# Altium PCB PCB1.PcbDoc
Units mm, origin at the board's own origin, x right, y up, seen from the top; angles counter-clockwise.
Board outline 76.12 x 44.95 mm, 2 copper layers (Top Layer, Bottom Layer); 30 components, 46 nets, 177 pads, 52 vias.
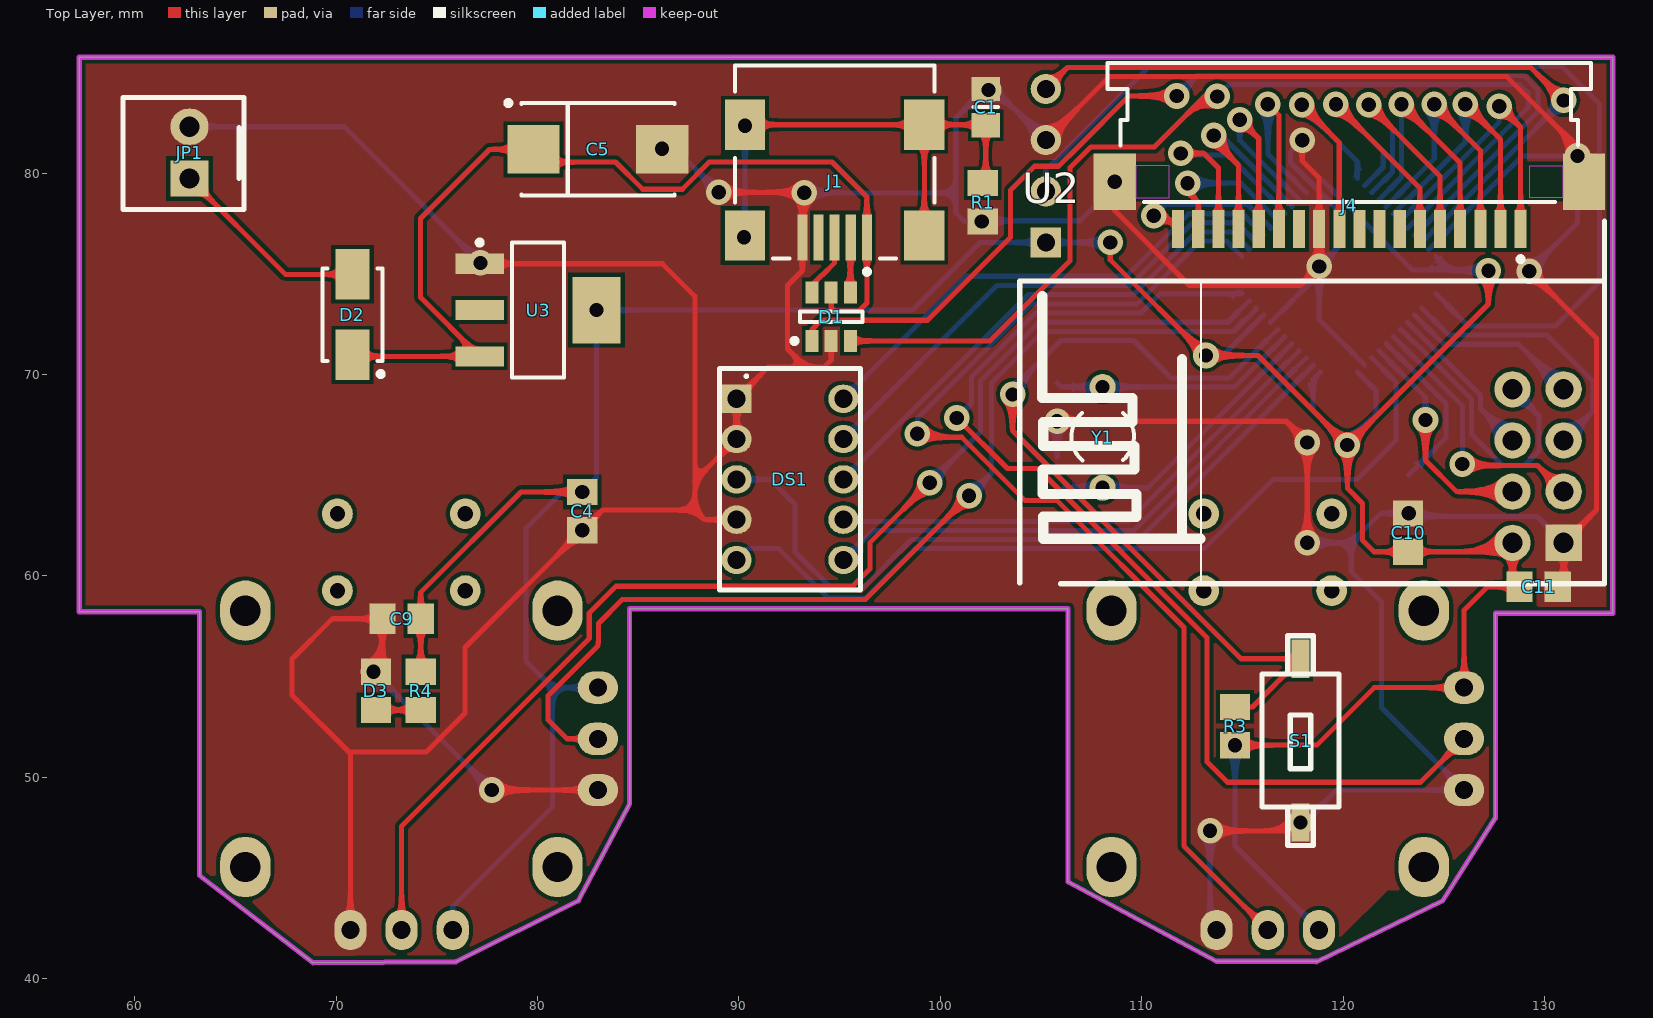
[diagram p0: Top Layer view]
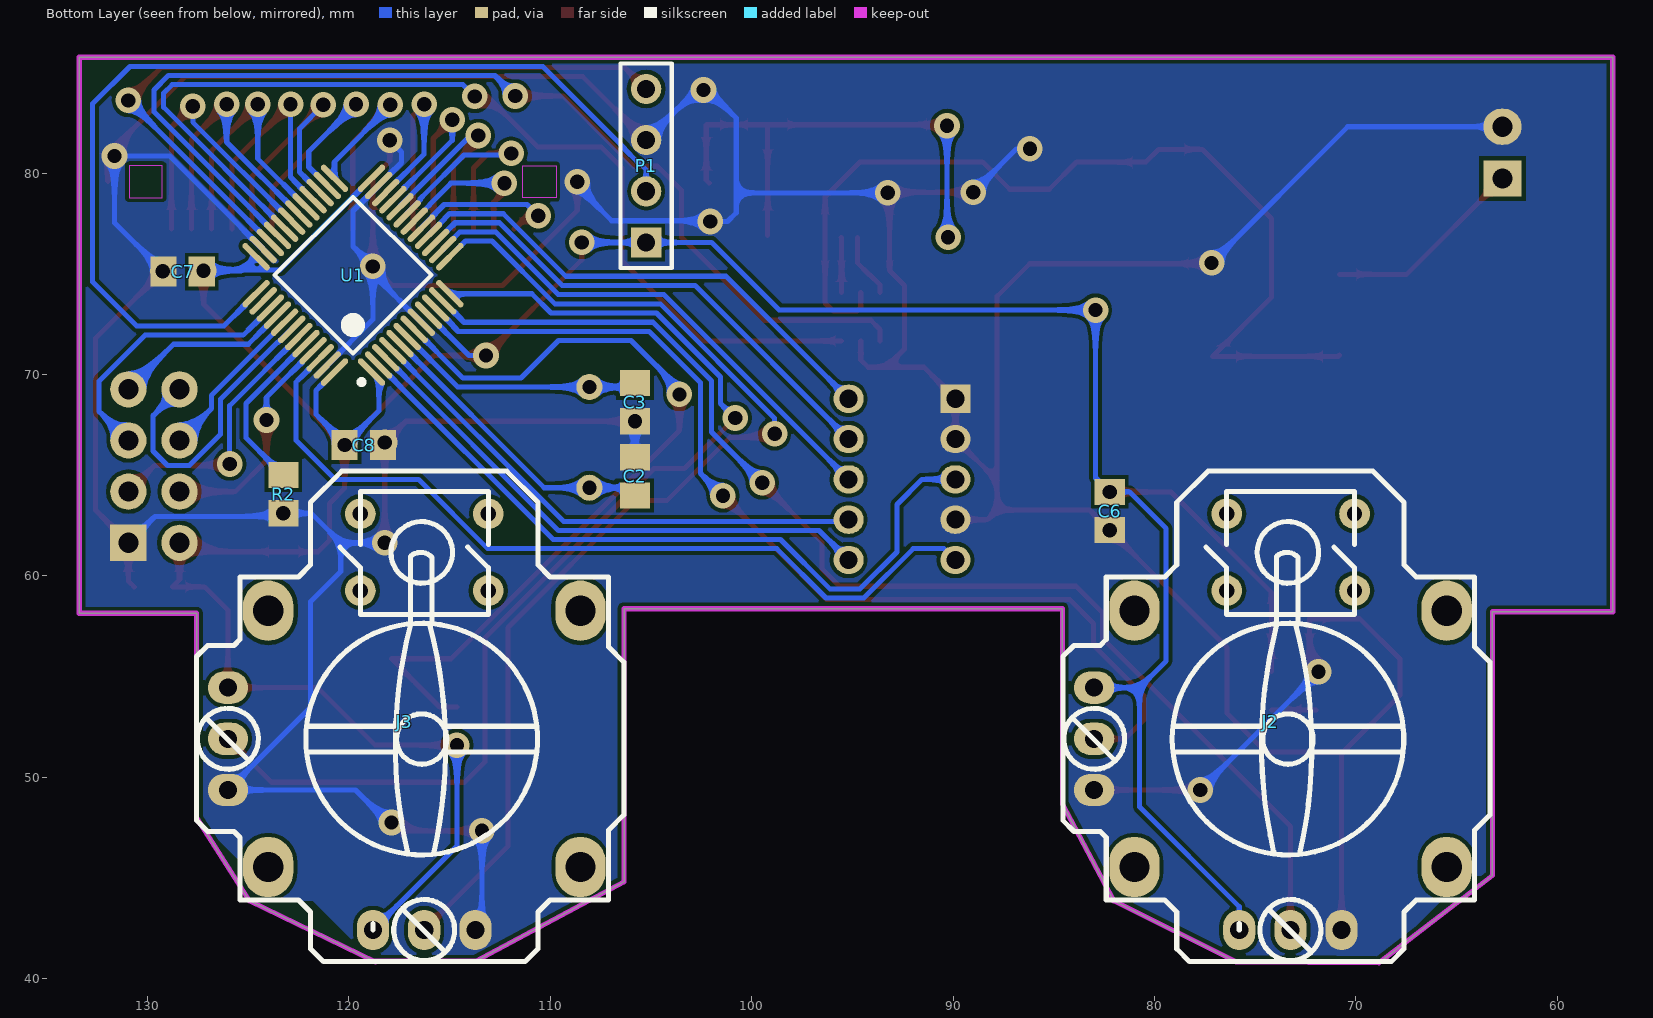
[diagram p1: Bottom Layer view, seen from below]

## Layer stack, top to bottom
Top Solder: solder mask 0.0102, Solder Resist, Dk 3.5
Top Layer: signal copper 0.0356
Dielectric 1: dielectric 0.32, FR-4, Dk 4.8
Bottom Layer: signal copper 0.0356
Bottom Solder: solder mask 0.0102, Solder Resist, Dk 3.5

## Board outline
63.225,45.129 68.85,40.8 75.95,40.85 82.025,43.875 84.575,48.7 84.575,58.375 106.325,58.375 106.325,44.812 113.7,40.875 118.675,40.875 118.675,40.85 124.925,43.875 127.55,47.975 127.55,58.15 133.375,58.15 133.375,85.75 57.25,85.75 57.25,58.225 63.225,58.225

## Design rules (kind name [scope] priority, off if disabled: settings)
AssemblyTestPointUsage [All] p1 off:
AssemblyTestpoint [All] p1 off: testpointundercomponent=TRUE minsize=1.016 maxsize=2.54 preferedsize=1.524 minholesize=0 maxholesize=1.016 preferedholesize=0.813 testpointgrid=0.025 usegrid=TRUE gridtolerance=0 allowsidetop=TRUE allowsidebottom=TRUE
Clearance [All] p1: gap=0.198
ComponentClearance [All] p1 off: gap=0.254 collisioncheckmode=3 verticalgap=0.254 showdistances=FALSE
FabricationTestPointUsage [All] p1 off: valid=0 allowmultiple=FALSE
FabricationTestpoint [All] p1 off: side=3 testpointundercomponent=TRUE minsize=1.016 maxsize=2.54 preferedsize=1.524 minholesize=0 maxholesize=1.016 preferedholesize=0.813 testpointgrid=0.025 allowsidetop=TRUE allowsidebottom=TRUE usegrid=TRUE gridtolerance=0
Height [All] p1 off: minheight=0 maxheight=25.4 prefheight=12.7
HoleSize [All] p1 off: absolutevalues=TRUE maxlimit=2.54 minlimit=0.025 maxpercent=80.000 minpercent=20.000
HoleToHoleClearance [All] p1 off: gap=0.254 allowstackedmicrovias=TRUE
LayerPairs [All] p1 off: enforce=TRUE
MinimumSolderMaskSliver [All] p1 off: minsoldermaskwidth=0.254
NetAntennae [All] p1 off: netantennaetolerance=0
PasteMaskExpansion [All] p1 off: expansion=0
PlaneConnect [All] p1: planeconnectstyle=Direct reliefexpansion=0.508 reliefentries=4 reliefconductorwidth=0.254 reliefairgap=0.254
PolygonConnect [All] p1: connectstyle=Direct reliefconductorwidth=0.254 reliefentries=4 polygonreliefangle="90 Angle" airgapwidth=0.254
RoutingPriority all [NOT InNet('GND')] p1: routingpriority=100
RoutingPriority GND [InNet('GND')] p2: routingpriority=1
RoutingVias [All] p1: holewidth=0.4 width=0.8 viastyle="Through Hole" minholewidth=0.4 minwidth=0.8 maxholewidth=0.4 maxwidth=0.8
SilkToSilkClearance [All] p1 off: silktosilkclearance=0.254
SilkToSolderMaskClearance [IsPad] p1 off: minsilkscreentomaskgap=0.254 clearancetoexposedcopper=TRUE
SolderMaskExpansion [All] p1 off: expansion=0.102
Width [All] p1: maxlimit=0.6 minlimit=0.254 preferedwidth=0.254
14 further rules are at their usual default settings.

## Components (designator, comment, footprint, x,y, rotation, side; value= is the part's Value field where it differs from the comment)
C1 "100n" 6-0805_N 102.25,83.275 r270 top
C2 "Cap_UP" 2012[0805] 105.791,64.948 r270 bottom
C3 "Cap_UP" 2012[0805] 105.791,68.631 r90 bottom
C4 "Cap_UP" 2012[0805] 82.22,63.221 r90 top
C5 "Cap_El" 7343 83,81.175 r0 top
C6 "Cap_UP" 2012[0805] 82.225,63.225 r90 bottom
C7 "Cap_UP" 2012[0805] 128.245,75.108 r180 bottom
C8 "Cap_UP" 2012[0805] 119.253,66.497 r0 bottom
C9 "Cap_UP" 2012[0805] 73.25,57.875 r0 top
C10 "Cap_UP" 2012[0805] 123.215,62.154 r270 top
C11 "Cap_UP" 2012[0805] 129.692,59.461 r180 top
D1 "PRTR5V0U2X" PRTR5V0U2D 94.615,72.873 r180 top
D2 "ss14" US1m 70.815,72.974 r270 top
D3 "Diode" 2012[0805] 71.975,54.3 r90 top
DS1 "7Seg Blue-CC" "7Segment Small" 92.532,64.795 r180 top
J1 "USB_AB" USB_MINI 94.75,80.75 r180 top
J2 "JOY-STICK" "JOY STICK" 64.008,47.117 r90 bottom
J3 "JOY-STICK" "JOY STICK" 107.008,47.117 r90 bottom
J4 "52207-1833" MOLX-52207-1833 120.3,78.4 r180 top
JP1 "Header 2" HDR1X2A 62.725,79.73 r90 top
P1 "Header 4" HDR1X4 105.232,76.556 r90 bottom
R1 "1M" 2012[0805] 102.1,78.55 r90 top
R2 "Res" 2012[0805] 123.241,64.059 r90 bottom
R3 "Res" 2012[0805] 114.625,52.55 r270 top
R4 "Res" 2012[0805] 74.2,54.3 r270 top
S1 "SW-SPST" SW-SMD 117.875,51.825 r270 top
U1 "STM32F103C8T6" LQFP48_N 119.786,74.93 r45 bottom
U2 "nrf24L01" NRF24L01 132.969,59.614 r180 top
U3 "LM1117DT-3.3" SOT223 80.025,73.2 r0 top
Y1 "XTAL" R38 108.052,66.929 r0 top

## Footprints (in the part's own frame and the unit in brackets; to place one, negate y for a bottom-side part, rotate by r counter-clockwise, add the part's x,y. Pads: shape width x height; smd on the part's side, far side on the other; paste and mask are expansions set on the pad)
6-0805_N [mm] "Chip Resistor, Body 2.0x1.2mm, IPC Medium Density"
  rect 1.2x1.4 smd: 1(-0.9,0) 2(0.9,0)
  silkscreen extent 0,-0.6 0,0.6, body extent -1.07,-0.7 1.07,0.7, height 0.7
"7Segment Small" [mm]
  rect 1.5x1.4 hole 0.9: 1(2.65,-4)
  oval 1.5x1.4 hole 0.9: 2(2.65,-2) 3(2.65,0) 4(2.65,2) 5(2.65,4) 6(-2.65,4) 7(-2.65,2) 8(-2.65,0) 9(-2.65,-2) 10(-2.65,-4)
  silkscreen extent -3.5,-5.5 3.5,5.5, body extent -3.54,-5.48 3.5,5.55, height 4.8
2012[0805] [mm] "Chip Resistor; Body 2.0 x 1.3 mm (LxW typ)"
  rect 1.3x1.5 smd: 1(-0.95,0) 2(0.95,0)
  body extent -1.22,-0.75 1.28,0.75, height 0.5
7343 [mm] "Capacitor, SM Tantalum; Body 7.3 x 4.3 mm (LxW typ)"
  rect 2.6x2.4 smd: 1(-3.2,0) 2(3.2,0)
  silkscreen extent -4.57,-2.3 3.8,2.42, body extent -3.9,-2.4 3.9,2.4, height 2
HDR1X2A [mm]
  rect 1.8x1.9 hole 1: 1(0,0)
  oval 1.8x1.9 hole 1: 2(2.57,0)
  silkscreen extent -1.55,-2.7 4.02,3.3, body extent -1.45,-2.58 3.9,3.2, height 4
HDR1X4 [mm] "Connector; Header; 4 Position"
  rect 1.5x1.5 hole 0.9: 1(0,0)
  round 1.5 hole 0.9: 2(2.54,0) 3(5.08,0) 4(7.62,0)
  silkscreen extent -1.27,-1.27 8.89,1.27
"JOY STICK" [mm]
  oval 2x1.6 hole 0.9: 1(-4.69,6.703) 2(-4.69,9.243) 3(-4.69,11.783)
  oval 1.6x2 hole 0.9: 4(2.259,18.986) 5(4.799,18.986) 6(7.339,18.986)
  round 1.524 hole 0.762: 7(15.968,6.06) 7(15.968,12.41) 8(12.158,6.06) 8(12.158,12.41)
  oval 3x2.5 hole 1.5: 12(-1.563,1.486) 12(-1.563,16.986) 12(11.158,1.486) 12(11.158,16.986)
  silkscreen extent -6.26,-0.67 18.08,20.54
LQFP48_N [mm] "Thin QFP, 48-Leads, Body 7x7mm, Pitch 0.5mm, IPC Medium Density"
  oval 1.8x0.3 smd: 1(-4.05,2.75) 2(-4.05,2.25) 3(-4.05,1.75) 4(-4.05,1.25) 5(-4.05,0.75) 6(-4.05,0.25) 7(-4.05,-0.25) 8(-4.05,-0.75) 9(-4.05,-1.25) 10(-4.05,-1.75) 11(-4.05,-2.25) 12(-4.05,-2.75) 25(4.05,-2.75) 26(4.05,-2.25) 27(4.05,-1.75) 28(4.05,-1.25) 29(4.05,-0.75) 30(4.05,-0.25) 31(4.05,0.25) 32(4.05,0.75) 33(4.05,1.25) 34(4.05,1.75) 35(4.05,2.25) 36(4.05,2.75)
  oval 0.3x1.8 smd: 13(-2.75,-4.05) 14(-2.25,-4.05) 15(-1.75,-4.05) 16(-1.25,-4.05) 17(-0.75,-4.05) 18(-0.25,-4.05) 19(0.25,-4.05) 20(0.75,-4.05) 21(1.25,-4.05) 22(1.75,-4.05) 23(2.25,-4.05) 24(2.75,-4.05) 37(2.75,4.05) 38(2.25,4.05) 39(1.75,4.05) 40(1.25,4.05) 41(0.75,4.05) 42(0.25,4.05) 43(-0.25,4.05) 44(-0.75,4.05) 45(-1.25,4.05) 46(-1.75,4.05) 47(-2.25,4.05) 48(-2.75,4.05)
  silkscreen extent -4.17,-2.75 2.75,3.57, body extent -3.5,-3.5 3.5,3.5, height 1.6
MOLX-52207-1833 [mm] "FPC Connector, 18-Leads, Right Angle, Pitch 1.0 mm, Mated Height 2.7 mm, SMT"
  rect 0.6x1.9 smd: 1(-8.5,1.175) 2(-7.5,1.175) 3(-6.5,1.175) 4(-5.5,1.175) 5(-4.5,1.175) 6(-3.5,1.175) 7(-2.5,1.175) 8(-1.5,1.175) 9(-0.5,1.175) 10(0.5,1.175) 11(1.5,1.175) 12(2.5,1.175) 13(3.5,1.175) 14(4.5,1.175) 15(5.5,1.175) 16(6.5,1.175) 17(7.5,1.175) 18(8.5,1.175)
  rect 2.1x2.8 smd: MP1(-11.65,-1.175) MP2(11.65,-1.175)
  Keep-Out Layer region: -10.6,-0.375 -8.95,-0.375 -8.95,-1.975 -10.6,-1.975
  Keep-Out Layer region: 10.6,-0.375 8.95,-0.375 8.95,-1.975 10.6,-1.975
  silkscreen extent -12,-7.08 12,2.8, body extent -12.15,-7.07 12.15,1.83, height 2.71
NRF24L01 [mm]
  rect 1.8x1.8 hole 1: 1(2.032,-2.032)
  round 1.8 hole 1: 2(4.572,-2.032) 3(2.032,-4.572) 4(4.572,-4.572) 5(2.032,-7.112) 6(4.572,-7.112) 7(2.032,-9.652) 8(4.572,-9.652)
  silkscreen extent 0,-18 29.03,0
PRTR5V0U2D [mm]
  rect 0.65x1.1 smd: 1(0.987,1.204) 2(0.037,1.204) 3(-0.913,1.204) 4(-0.913,-1.196) 5(0.037,-1.196) 6(0.987,-1.196)
  silkscreen extent -1.51,-0.25 1.99,1.33, body extent -1.51,-0.9 1.59,0.9, height 1.1
R38 [mm] "Crystal, Thru-Hole; 2 Leads; Body 3.1 x 8.2 mm (Dia.xH)"
  round 1.3 hole 0.7: 1(0,2.45) 2(0,-2.55)
  silkscreen extent -1.55,-1.19 1.55,1.17
SOT223 [mm] "SOT223, 4-Leads, Body 6.7x7.3mm (max), Pitch 2.30mm, IPC Medium Density"
  rect 2.4x1 smd: 1(-2.9,2.3) 2(-2.9,0) 3(-2.9,-2.3)
  rect 2.4x3.3 smd: 4(2.9,0)
  silkscreen extent -3.02,-3.35 1.3,3.47, body extent -1.85,-3.35 1.85,3.35, height 1.8
SW-SMD [mil]
  rect 75x35 smd: 1(-160,0) 2(160,0)
  silkscreen extent -205,-75 205,75
US1m [mm] "Molded Diode, 2-Leads, Body 4.3x2.6mm, IPC Medium Density"
  rect 2.5x1.7 smd: 1(-2,0) 2(2,0)
  silkscreen extent -2.3,-1.5 3.07,1.53, body extent -2.3,-1.46 2.3,1.46, height 2.3
USB_MINI [mm]
  rect 0.5x2.3 smd: 1(-1.6,3.95) 2(-0.8,3.95) 3(0,3.95) 4(0.8,3.95) 5(1.6,3.95)
  rect 2x2.5 smd: 6(4.45,3.85) 7(4.45,-1.65) 8(-4.45,3.85) 9(-4.45,-1.65)
  silkscreen extent -4.95,-4.6 4.95,5.77

## Part data
C1: library part Cap, "Capacitor"
C2 C3 C4 C5 C6 C7 C8 C9 C10 C11: "Capacitor"
D1: "Double rail-to-rail USB ESD protection diode"
D2: library part "D Schottky", "Schottky Diode"
D3: "1 Amp General Purpose Rectifier"
DS1: library part "7Seg Blue-CC_1", "14.2 mm General Purpose Blue 7-Segment Display: CC, RH DP, Gray Surface"
J1: "Micro USB AB Connector"
J2 J3: library part "JOY STICK"
J4: "1.0 mm Pitch Easy-On(TM) Type FPC Connector, 2.7 mm Mated Height, Right Angle, ZIF, SMT, Top Contact, 18 Circuits, -40 to 85 degC, ELV and RoHS Compliant, Tape and Reel"
JP1: "Header, 2-Pin"
P1: "Header, 4-Pin"
R1: library part Res, "Semiconductor Resistor"
R2 R3 R4: "Semiconductor Resistor"
S1: "Single-Pole, Single-Throw Switch"
U1: "STM32 ARM-based 32-bit MCU with 64 Kbytes Flash, 48-pin LQFP, Industrial Temperature"
U3: "800mA Low-Dropout Linear Regulator, 3-pin TO-252"
Y1: "Crystal Oscillator"

## Via types
v1: diameter 1.27, hole 0.711, Top Layer to Bottom Layer, 52 vias

## Nets (pads, with @x,y where several pads share a name; then routed paths per layer and width w, separated by ;. In a path a pad name is that pad's centre, name@x,y a point inside that pad or via, vN(x,y) a via of type N, cw(c..) or ccw(c..) an arc to the next point about the centre after c; other vN are vias at no path point)
3.3V: C4.2 C6.2 C7.2 C8.2 C9.2 C10.2 C11.2 J2.3 J2.6 J3.3 J3.6 P1.1 R3.2 R4.1 U1.1 U1.9 U1.24 U1.36 U1.48 U2.2 U3.4 | length 178.4
  Top Layer w0.254: R4.1 C9.2 74.2,59.189 79.182,64.171 v1(82.22,64.171) ; v1(108.433,76.556) 108.433,75.692 v1(113.182,70.942) 115.758,70.942 v1(120.203,66.497) ; v1(114.625,51.6) 118.681,51.6 121.538,54.456 J3.6 125.994,58.303 127.152,59.461 C11.2 128.397,59.807 U2.2 127.955,61.204 C10.2 121.524,61.204 120.955,61.773 120.955,63.602 120.203,64.353 v1(120.203,66.497) ; v1(127.203,75.159) 127.203,73.497 v1(120.203,66.497)
  Bottom Layer w0.254: J2.3 75.791,43.584 80.748,48.541 80.748,54.456 ; J2.6 80.748,54.456 ; v1@108.458,76.581 v1(108.433,76.556) P1.1 101.981,76.556 98.625,73.2 v1(82.925,73.2) 82.925,64.875 C6.2 81.244,64.175 79.419,62.35 79.419,55.785 80.748,54.456 ; v1(113.182,70.942) 114.031,70.942 U1.9 ; v1(114.625,51.6) 114.625,46.593 J3.3 ; U1.1 118.501,69.756 118.501,68.199 v1(120.203,66.497) 120.203,66.609 121.615,68.021 121.615,69.212 U1.48 ; U1.24 123.408,75.197 125.246,75.197 ; U1.36 125.246,75.197 ; C7.2@127.178,75.184 v1(127.203,75.159) 125.285,75.159 125.246,75.197 ; C7.2@127.295,75.197 125.246,75.197
5V: C5.1 D1.5 D2.2 J1.1 U3.3 | length 48.1
  Top Layer w0.254: D2.2 70.889,70.9 U3.3 74.193,73.832 74.193,77.749 77.619,81.175 C5.1 80.432,80.543 83.872,80.543 85.218,79.197 87.182,79.197 88.528,80.543 94.615,80.543 96.35,78.808 J1.1 96.35,73.556 95.941,73.147 94.773,73.147 94.578,73.341 D1.5
7SEGA: DS1.6 U1.3 | length 27.1
  Bottom Layer w0.254: DS1.6 96.647,62.261 109.592,62.261 U1.3
7SEGB: DS1.5 U1.46 | length 41.8
  Bottom Layer w0.254: DS1.5 90.443,61.357 91.979,61.357 94.428,58.908 96.301,58.908 98.75,61.357 113.096,61.357 116.535,64.795 120.675,64.795 122.606,66.726 122.606,69.636 U1.46
7SEGC: DS1.3 U1.2 | length 36.9
  Bottom Layer w0.254: DS1.3 91.542,64.795 92.786,63.551 92.786,61.189 94.615,59.36 96.114,59.36 98.562,61.809 109.847,61.809 U1.2
7SEGD: DS1.10 U1.16 | length 25.1
  Bottom Layer w0.254: DS1.10 101.266,74.879 109.22,74.879 112.324,77.983 115.001,77.983 116.003,76.981 116.003,76.91 U1.16
7SEGE: DS1.9 U1.15 | length 25.4
  Bottom Layer w0.254: DS1.9 102.814,74.427 109.407,74.427 112.511,77.531 114.71,77.531 U1.15
7SEGF: DS1.7 U1.4 | length 26.2
  Bottom Layer w0.254: DS1.7 95.265,62.713 109.337,62.713 U1.4
7SEGG: DS1.8 U1.14 | length 25.6
  Bottom Layer w0.254: DS1.8 104.362,73.975 109.594,73.975 112.698,77.079 114.49,77.079 115.296,76.273 115.296,76.203 U1.14
"ANALOG POWER": J3.5 U1.12 | length 54.7
  Top Layer w0.254: v1(100.813,67.843) 103.327,65.329 104.837,65.329 113.233,56.933 113.233,50.775 114.249,49.759 123.837,49.759 J3.5
  Bottom Layer w0.254: v1(100.813,67.843) 101.54,68.57 101.54,69.874 104.721,73.056 109.953,73.056 110.908,74.011 U1.12
ANALOGW: J3.2 U1.13 | length 54.8
  Top Layer w0.254: v1(98.857,67.056) 99.029,66.883 101.061,66.883 104.191,63.754 105.773,63.754 112.09,57.437 112.09,46.588 J3.2
  Bottom Layer w0.254: v1(98.857,67.056) 98.857,67.831 104.534,73.508 109.766,73.508 112.886,76.627 114.2,76.627 U1.13
ANALOGX: J2.2 U1.11 | length 61
  Top Layer w0.254: J2.2 73.251,47.572 82.569,56.89 82.569,58.16 83.896,59.487 95.631,59.487 96.495,60.35 96.495,61.65 v1(99.466,64.622)
  Bottom Layer w0.254: v1(99.466,64.622) 101.992,67.147 101.992,69.687 104.898,72.593 114.268,72.593 U1.11
ANALOGY: J2.5 U1.10 | length 50.5
  Top Layer w0.254: J2.5 81.459,51.916 80.518,52.857 80.518,54.051 83.007,56.54 83.007,56.689 83.021,56.703 83.021,57.647 84.202,58.827 96.267,58.827 v1(101.422,63.983)
  Bottom Layer w0.254: v1(101.422,63.983) 102.54,65.1 102.54,69.596 105.085,72.141 114.558,72.141 115.65,73.233 115.65,73.304 U1.10
BATTERY: D2.1 JP1.1 | length 10.1
  Top Layer w0.254: JP1.1 67.481,74.974 D2.1
CE: U1.43 U2.3 | length 13.4
  Top Layer w0.254: v1(125.908,65.557) 125.984,65.481 129.642,65.481 U2.3
  Bottom Layer w0.254: U1.43 125.908,68.455 v1(125.908,65.557)
CS: U1.45 U2.4 | length 11.5
  Top Layer w0.254: v1(124.079,67.742) 124.079,65.735 125.628,64.186 U2.4
  Bottom Layer w0.254: U1.45 124.079,68.87 v1(124.079,67.742) v1@124.079,67.589
GND: C1.1 C2.1 C3.1 C4.1 C5.2 C6.1 C7.1 C8.1 C9.1 C10.1 C11.1 D1.2 D3.2 DS1.1 DS1.2 DS1.4 J1.5 J2.1 J2.4 J3.1 J3.4 J4.11 J4.MP1 J4.MP2 JP1.2 P1.3 R1.1 R2.1 S1.2 U1.8 U1.23 U1.35 U1.47 U2.1 U3.1 | length 326
  Top Layer w0.254: J2.1 70.711,51.184 70.637,51.257 ; D3.2 72.3,55.575 C9.1 69.813,57.875 67.818,55.88 67.818,54.077 70.637,51.257 ; U3.1 86.196,75.5 87.808,73.889 87.808,64.721 ; v1(77.723,49.376) J2.4 ; v1(89.002,79.045) v1@93.218,79.045 ; DS1.4 88.284,62.795 87.808,63.271 ; v1@93.15,78.926 J1.5 93.15,75.167 92.405,74.422 92.405,71.272 93.32,70.358 ; D1.2 94.578,70.727 94.209,70.358 93.32,70.358 ; P1.3 108.382,84.785 128.118,84.785 131.95,80.953 J4.MP1 ; v1(105.791,67.681) 117.155,67.681 v1(118.212,66.624) v1(118.212,61.646) ; v1(108.65,79.575) 108.65,78.142 112.37,74.422 117.856,74.422 v1(118.8,75.366) J4.11 118.8,79.752 117.958,80.594 v1(117.958,81.636) ; v1(113.386,47.346) 117.46,47.346 v1(117.875,47.761) ; v1(129.235,75.133) 132.563,71.806 132.563,63.271 U2.1 130.937,59.756 C11.1 ; 70.637,51.257 74.473,51.257 76.403,53.188 76.403,56.454 C4.1 83.221,63.271 87.808,63.271 ; 87.808,63.271 87.808,64.721 ; 87.808,64.721 DS1.2 DS1.1 91.445,70.358 93.32,70.358
  Bottom Layer w0.254: JP1.2 70.405,82.3 v1(77.165,75.54) ; v1@71.855,55.244 v1(77.723,49.376) ; v1(86.182,81.204) 86.843,81.204 v1(89.002,79.045) ; v1(93.243,79.019) 100.762,79.019 ; v1@102.184,84.15 100.762,82.728 100.762,79.019 ; v1@102.718,84.15 P1.3 ; C2.1 v1(105.791,67.681) ; v1@108.687,79.375 106.942,77.631 102.091,77.631 v1(102.057,77.597) 101.194,77.597 100.762,78.029 100.762,79.019 ; v1(113.386,47.346) 113.386,42.752 J3.1 ; U1.8 v1@118.8,75.004 ; v1@117.805,47.523 119.658,49.376 J3.4 121.895,53.476 121.895,58.725 120.396,60.223 120.396,61.646 ; v1(117.958,81.636) 117.373,81.051 117.373,80.525 U1.23 119.786,78.112 119.786,76.352 v1(118.8,75.366) v1@118.8,75.004 ; v1(118.212,61.646) 120.396,61.646 ; U1.47 118.8,72.734 v1@118.8,75.004 ; U1.35 128.887,80.848 v1(131.623,80.848) 131.623,77.536 C7.1 ; U2.1 129.622,62.961 123.389,62.961 v1(123.241,63.109) 121.859,63.109 120.396,61.646
  other v1: 71.857,55.245 82.225,62.275 102.387,84.125
IRQ: U1.42 U2.8 | length 14.6
  Bottom Layer w0.254: U1.42 122.862,72.243 123.514,71.591 123.547,71.591 126.36,68.778 126.36,67.031 127.909,65.481 128.992,65.481 129.718,66.207 129.712,66.213 129.712,67.951 U2.8
KEY1: J4.1 U1.31 | length 14.3
  Top Layer w0.254: v1@127.749,83.325 128.8,82.274 J4.1
  Bottom Layer w0.254: U1.31 127.737,82.527 v1(127.737,83.312)
KEY2: J4.2 U1.30 | length 13.8
  Top Layer w0.254: v1(126.06,83.414) 127.8,81.674 J4.2
  Bottom Layer w0.254: U1.30 122.483,77.971 126.06,81.548 v1(126.06,83.414)
KEY3: J4.3 U1.29 | length 13.2
  Top Layer w0.254: v1(124.511,83.414) 126.8,81.124 J4.3
  Bottom Layer w0.254: U1.29 124.511,80.715 v1(124.511,83.414)
KEY4: J4.4 U1.28 | length 12.6
  Top Layer w0.254: v1(122.885,83.414) 125.8,80.499 J4.4
  Bottom Layer w0.254: U1.28 122.885,79.797 v1(122.885,83.414)
KEY5: J4.5 U1.27 | length 12.9
  Top Layer w0.254: v1(121.26,83.388) 124.8,79.848 J4.5
  Bottom Layer w0.254: v1(121.26,83.388) 122.433,82.215 122.433,80.052 U1.27
KEY6: J4.6 U1.26 | length 13.3
  Top Layer w0.254: v1(119.634,83.414) 123.8,79.248 J4.6
  Bottom Layer w0.254: v1(119.634,83.414) 121.981,81.066 121.981,80.307 U1.26
KEY7: J4.10 U1.25 | length 11.7
  Top Layer w0.254: v1(117.932,83.388) 119.8,81.52 J4.10
  Bottom Layer w0.254: v1(117.932,83.388) 117.932,83.337 120.706,80.564 U1.25
KEY8: J4.13 U1.22 | length 11.6
  Top Layer w0.254: v1(116.256,83.414) 116.8,82.869 J4.13
  Bottom Layer w0.254: v1(116.256,83.414) 116.256,80.935 U1.22
KEY9: J4.14 U1.21 | length 11
  Top Layer w0.254: v1(114.859,82.652) 115.8,81.71 J4.14
  Bottom Layer w0.254: v1(114.859,82.652) 114.859,81.625 U1.21
KEY10: J4.15 U1.20 | length 10.5
  Top Layer w0.254: v1(113.563,81.864) 113.563,81.61 114.8,80.374 J4.15
  Bottom Layer w0.254: v1(113.563,81.864) 113.953,81.864 116.801,79.016 116.801,79.011 117.453,78.359 U1.20
KEY11: J4.16 U1.19 | length 11.7
  Top Layer w0.254: v1(111.938,80.975) 113.081,80.975 113.8,80.256 J4.16
  Bottom Layer w0.254: v1(111.938,80.975) 112.014,80.899 114.279,80.899 116.349,78.829 116.349,78.824 116.448,78.726 116.448,78.658 117.099,78.006 U1.19
KEY12: J4.17 U1.18 | length 7.8
  Top Layer w0.254: v1(112.268,79.502) 112.268,79.096 112.8,78.564 J4.17
  Bottom Layer w0.254: v1(112.268,79.502) 114.945,79.502 114.945,79.466 115.996,78.416 115.996,78.402 116.746,77.652 U1.18
KEY13: J4.18 U1.17 | length 8
  Top Layer w0.254: v1(110.592,77.876) 111.149,77.876 J4.18
  Bottom Layer w0.254: v1(110.592,77.876) 111.15,78.435 115.256,78.435 116.392,77.299 U1.17
MISO: U1.40 U2.7 | length 8.9
  Bottom Layer w0.254: U1.40 124.983,71.501 128.702,71.501 U2.7
MOSI: U1.41 U2.6 | length 8
  Bottom Layer w0.254: U1.41 126.812,68.965 126.812,68.311 U2.6
NetC1_2: C1.2 J1.6 J1.7 J1.8 J1.9 R1.2 | length 26
  Top Layer w0.254: J1.7 J1.9 ; J1.8 J1.9 ; R1.2 102.25,79.65 C1.2 102.225,82.4 J1.9
  Bottom Layer w0.254: v1(90.246,76.81) 90.297,76.86 v1(90.297,82.347)
NetC2_2: C2.2 U1.5 Y1.2 | length 14.8
  Bottom Layer w0.254: C2.2 106.172,64.379 Y1.2 110.296,64.379 U1.5
NetC3_2: C3.2 U1.6 Y1.1 | length 12.4
  Bottom Layer w0.254: C3.2 105.993,69.379 Y1.1 114.589,69.379 U1.6
NetD1_4: D1.4 J1.2 | length 2.7
  Top Layer w0.254: D1.4 95.528,76.778 J1.2
NetD1_6: D1.6 J1.3 | length 3.2
  Top Layer w0.254: D1.6 93.628,74.453 94.118,74.944 94.146,74.944 94.75,75.548 J1.3
NetD3_1: D3.1 R4.2 | length 2.2
  Top Layer w0.254: D3.1 R4.2
NetR2_2: R2.2 U1.44 | length 8.5
  Bottom Layer w0.254: U1.44 125.095,68.561 125.095,66.863 R2.2
NetR3_1: R3.1 S1.1 U1.7 | length 41.5
  Top Layer w0.254: v1(103.581,69.012) 103.581,67.224 114.916,55.889 S1.1 115.486,53.5 R3.1
  Bottom Layer w0.254: v1@103.213,68.923 105.979,71.689 109.591,71.689 111.449,69.831 114.334,69.831 U1.7
SCK: U1.39 U2.5 | length 13.5
  Bottom Layer w0.254: U1.39 125.238,71.953 130.104,71.953 132.385,69.672 132.385,68.174 U2.5
SWCLK: P1.2 U1.37 | length 50
  Bottom Layer w0.254: P1.2 105.232,80.162 105.63,80.561 105.677,80.561 106.307,81.19 106.307,81.237 110.363,85.293 130.861,85.293 132.715,83.439 132.715,74.6 130.52,72.405 126.2,72.405 U1.37
SWDIO: P1.4 U1.34 | length 36.8
  Top Layer w0.254: P1.4 106.299,85.242 129.3,85.242 v1(130.937,83.606)
  Bottom Layer w0.254: U1.34 v1(130.937,83.606)
USB_DM: D1.3 U1.32 | length 51
  Top Layer w0.254: D1.3 102.453,71.669 106.428,75.643 106.428,80.262 107.275,81.109 ; 107.275,81.11 107.465,81.3 110.612,81.3 113.117,83.805 v1(113.741,83.805)
  Bottom Layer w0.254: v1(113.741,83.805) 114.325,84.389 128.763,84.389 129.184,83.968 129.184,83.267 U1.32
USB_DP: D1.1 U1.33 | length 53.3
  Top Layer w0.254: D1.1 93.628,72.241 94.082,72.695 99.365,72.695 103.48,76.81 103.48,79.146 104.673,80.34 105.867,80.34 106.823,81.296 109.351,83.825 v1(111.735,83.825)
  Bottom Layer w0.254: v1(111.735,83.825) 112.751,84.841 128.951,84.841 129.667,84.125 129.667,83.043 U1.33
pads on no net: J1.4 J2.7 J2.8 J2.12 J3.7 J3.8 J3.12 J4.7 J4.8 J4.9 J4.12 U1.38 U3.2

## Polygon pours and split planes (outlines as drawn)
GND on Bottom Layer "GND_L02_P004" (solid, remove dead copper, pour order 4): 57.25,85.75 57.25,58.225 63.225,58.225 63.225,45.129 64.521,45.129 68.85,40.8 68.9,40.85 75.95,40.85 79,40.85 82.025,43.875 84.544,46.394 84.544,48.641 84.544,58.344 84.575,58.375 106.325,58.375 106.325,44.812 110.262,40.875 113.7,40.875 118.774,40.875 118.818,40.919 121.774,43.875 124.925,43.875 124.925,45.35 127.55,47.975 127.55,58.15 133.375,58.15 133.375,85.75 57.25,85.75
GND on Top Layer "GND_L01_P006" (solid, remove dead copper, pour order 6): 57.25,85.75 57.25,58.225 63.225,58.225 63.225,45.129 64.521,45.129 68.85,40.8 69.046,40.996 76.242,40.996 79.03,40.996 82.154,44.12 84.506,46.471 84.506,48.569 84.506,58.306 84.575,58.375 106.325,58.375 106.325,45.136 110.586,40.875 113.7,40.875 118.675,40.875 122.199,44.399 125.261,44.399 125.261,45.633 127.457,47.83 127.55,47.923 127.55,58.15 133.375,58.15 133.299,58.226 133.299,85.75 57.404,85.75

## Keep-outs
Keep-Out Layer:
  lines w0.254: 118.675,40.85 124.925,43.875 127.55,47.975 127.55,58.15 133.375,58.15 133.375,79.65 133.375,85.75 116.95,85.75 57.25,85.75 57.25,58.225 63.225,58.225 63.225,45.129 68.85,40.8 75.95,40.85 82.025,43.875 84.575,48.7 84.575,58.375 106.325,58.375 106.325,44.812 113.7,40.875 118.675,40.875